# Altium PCB dev-Carry-Rev0.PcbDoc
Units mm, origin at the board's own origin, x right, y up, seen from the top; angles counter-clockwise.
Board outline 82.5 x 99.83 mm, 2 copper layers (Top Layer, Bottom Layer); 1 components, 0 nets, 64 pads, 2 vias.
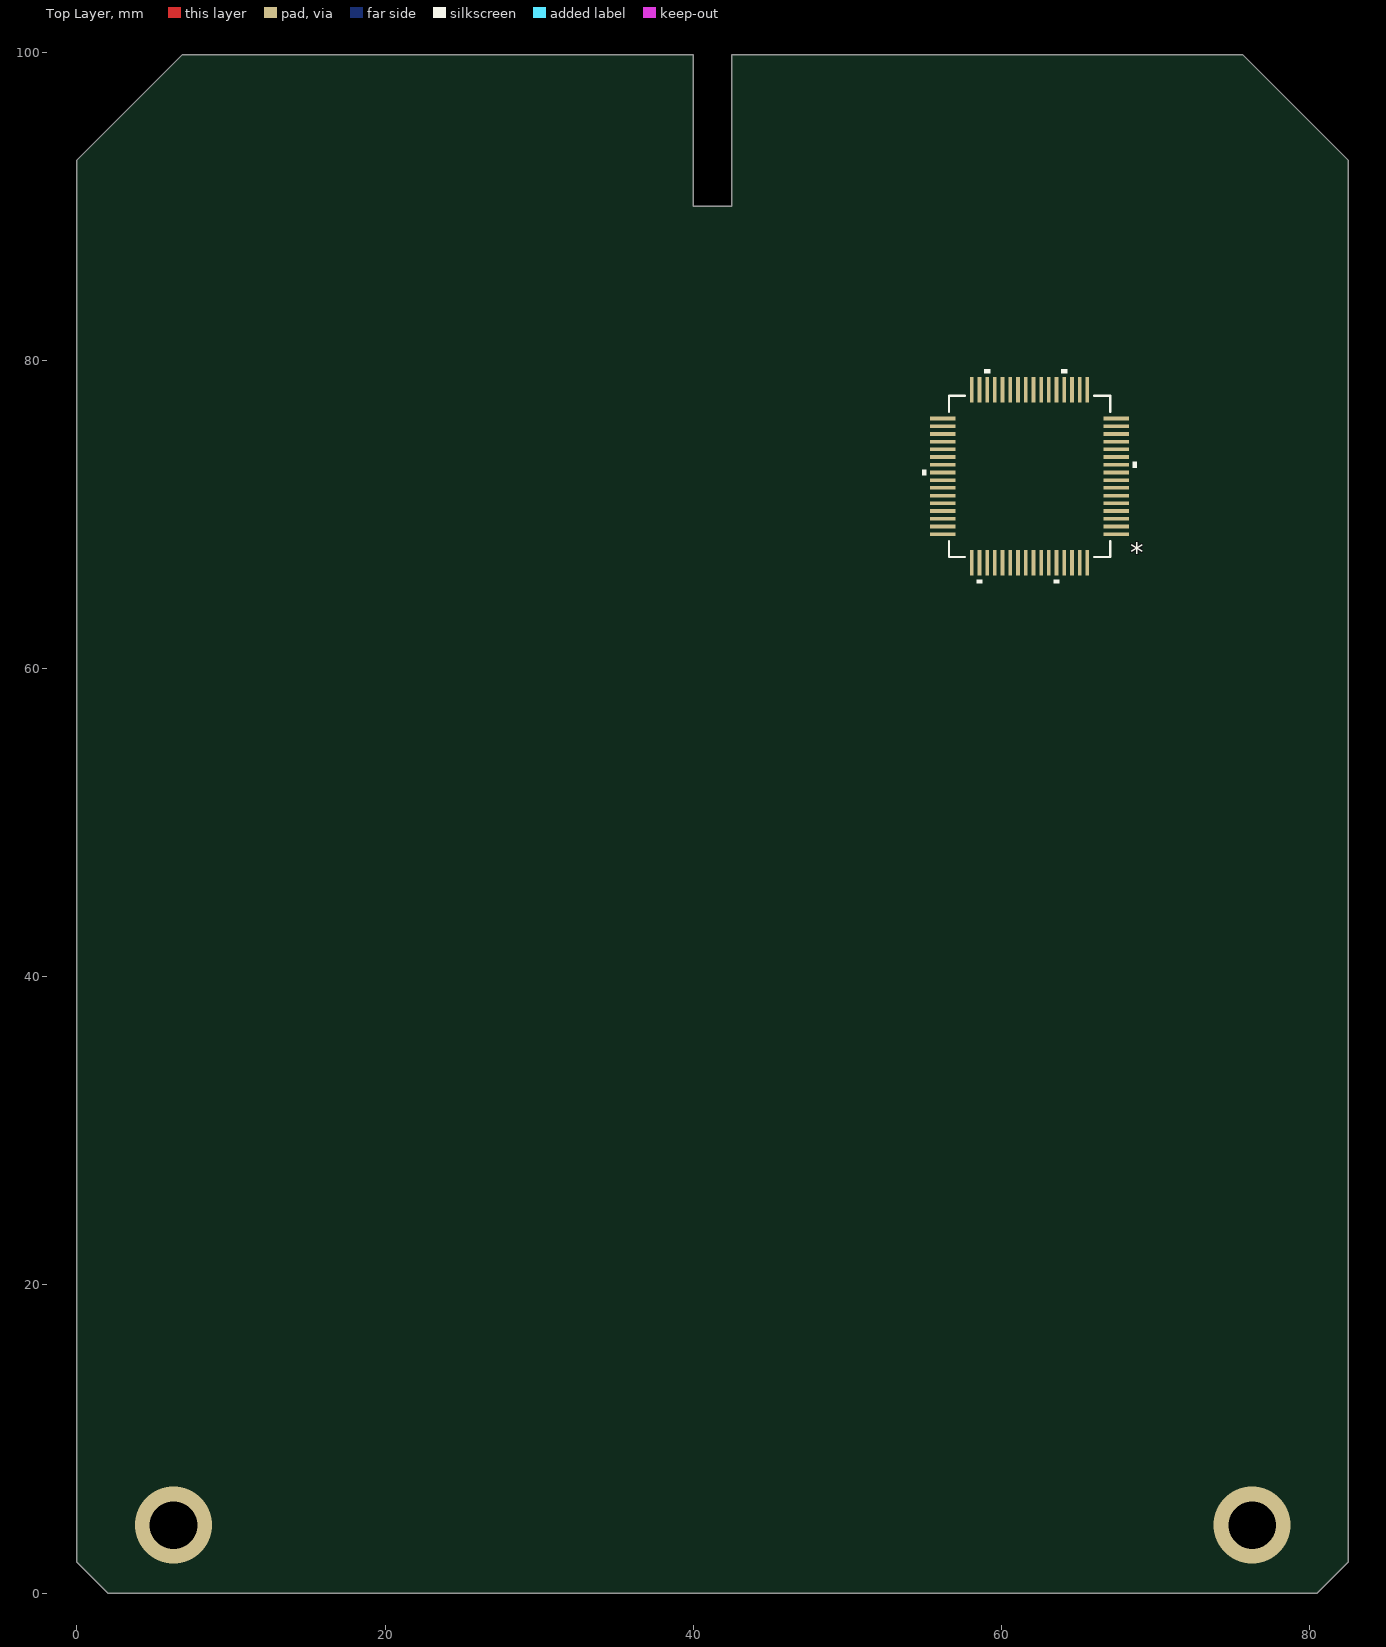
[diagram p0: Top Layer view]
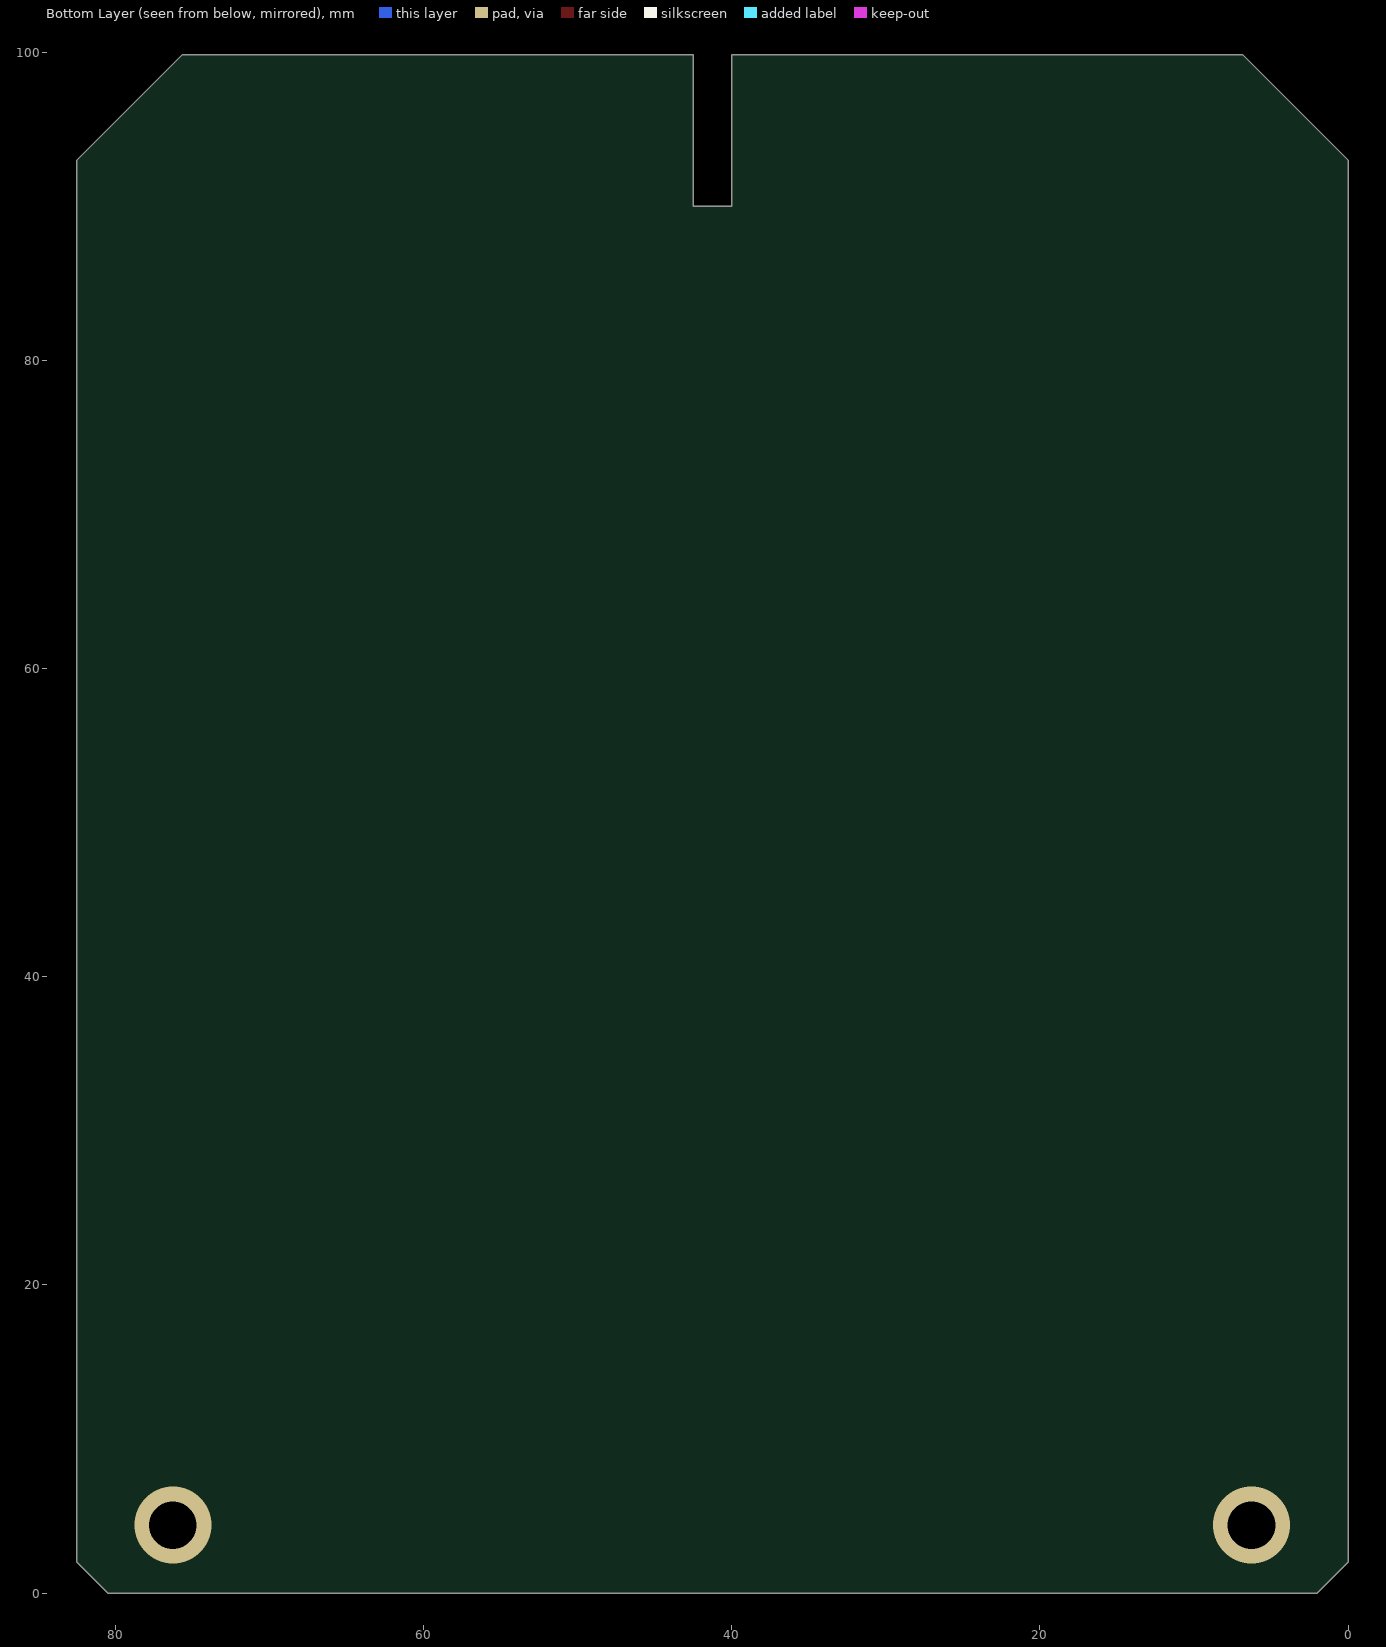
[diagram p1: Bottom Layer view, seen from below]

## Layer stack, top to bottom
Top Solder: solder mask 0.0102, Solder Resist, Dk 3.5
Top Layer: signal copper 0.0356
Dielectric 1: dielectric 0.32, FR-4, Dk 4.8
Bottom Layer: signal copper 0.0356
Bottom Solder: solder mask 0.0102, Solder Resist, Dk 3.5

## Board outline
42.5,99.825 42.5,90 40,90 40,99.825 6.825,99.825 0,93 0,2 2,0 80.5,0 82.5,2 82.5,93 75.675,99.825

## Design rules (kind name [scope] priority, off if disabled: settings)
Clearance [All] p1: gap=0.254 ignorepadtopadclearanceinfootprint=FALSE except(0: Arc-Hole Track-Hole SMDPad-Hole THPad-Hole Via-Hole Fill-Hole Poly-Hole Region-Hole Text-Hole)
PolygonConnect [All] p1: connectstyle=Relief reliefconductorwidth=0.254 reliefentries=4 polygonreliefangle="90 Angle" airgapwidth=0.254
RoutingVias [All] p1: holewidth=0.711 width=1.27 viastyle="Through Hole" minholewidth=0.711 minwidth=1.27 maxholewidth=0.711 maxwidth=1.27
SolderMaskExpansion [All] p1: expansion=0.102
Width [All] p1: maxlimit=0.254 minlimit=0.254 preferedwidth=0.254
30 further rules are at their usual default settings.

## Components (designator, comment, footprint, x,y, rotation, side; value= is the part's Value field where it differs from the comment)
? "Comment" PM64 61.825,72.475 r180 top

## Footprints (in the part's own frame and the unit in brackets; to place one, negate y for a bottom-side part, rotate by r counter-clockwise, add the part's x,y. Pads: shape width x height; smd on the part's side, far side on the other; paste and mask are expansions set on the pad)
PM64 [mm]
  rect 1.652x0.239 smd paste+0 mask+0: 1(-5.62,3.75) 2(-5.62,3.25) 3(-5.62,2.75) 4(-5.62,2.25) 5(-5.62,1.75) 6(-5.62,1.25) 7(-5.62,0.75) 8(-5.62,0.25) 9(-5.62,-0.25) 10(-5.62,-0.75) 11(-5.62,-1.25) 12(-5.62,-1.75) 13(-5.62,-2.25) 14(-5.62,-2.75) 15(-5.62,-3.25) 16(-5.62,-3.75) 33(5.62,-3.75) 34(5.62,-3.25) 35(5.62,-2.75) 36(5.62,-2.25) 37(5.62,-1.75) 38(5.62,-1.25) 39(5.62,-0.75) 40(5.62,-0.25) 41(5.62,0.25) 42(5.62,0.75) 43(5.62,1.25) 44(5.62,1.75) 45(5.62,2.25) 46(5.62,2.75) 47(5.62,3.25) 48(5.62,3.75)
  rect 0.239x1.652 smd paste+0 mask+0: 17(-3.75,-5.62) 18(-3.25,-5.62) 19(-2.75,-5.62) 20(-2.25,-5.62) 21(-1.75,-5.62) 22(-1.25,-5.62) 23(-0.75,-5.62) 24(-0.25,-5.62) 25(0.25,-5.62) 26(0.75,-5.62) 27(1.25,-5.62) 28(1.75,-5.62) 29(2.25,-5.62) 30(2.75,-5.62) 31(3.25,-5.62) 32(3.75,-5.62) 49(3.75,5.62) 50(3.25,5.62) 51(2.75,5.62) 52(2.25,5.62) 53(1.75,5.62) 54(1.25,5.62) 55(0.75,5.62) 56(0.25,5.62) 57(-0.25,5.62) 58(-0.75,5.62) 59(-1.25,5.62) 60(-1.75,5.62) 61(-2.25,5.62) 62(-2.75,5.62) 63(-3.25,5.62) 64(-3.75,5.62)
  silkscreen extent -6.95,-6.95 6.95,6.95, body extent -6.1,-6.1 6.1,6.1, height 1.6

## Via types
v1: diameter 5, hole 3.1, Top Layer to Bottom Layer, 2 vias

## Nets (pads, with @x,y where several pads share a name; then routed paths per layer and width w, separated by ;. In a path a pad name is that pad's centre, name@x,y a point inside that pad or via, vN(x,y) a via of type N, cw(c..) or ccw(c..) an arc to the next point about the centre after c; other vN are vias at no path point)
pads on no net: ?.1 ?.2 ?.3 ?.4 ?.5 ?.6 ?.7 ?.8 ?.9 ?.10 ?.11 ?.12 ?.13 ?.14 ?.15 ?.16 ?.17 ?.18 ?.19 ?.20 ?.21 ?.22 ?.23 ?.24 ?.25 ?.26 ?.27 ?.28 ?.29 ?.30 ?.31 ?.32 ?.33 ?.34 ?.35 ?.36 ?.37 ?.38 ?.39 ?.40 ?.41 ?.42 ?.43 ?.44 ?.45 ?.46 ?.47 ?.48 ?.49 ?.50 ?.51 ?.52 ?.53 ?.54 ?.55 ?.56 ?.57 ?.58 ?.59 ?.60 ?.61 ?.62 ?.63 ?.64
copper on no net:
  other v1: 6.275,4.41 76.275,4.41

## Text inside footprints (layer, text, board x,y; h text height)
?: Top Overlay "*" at 69.223,68.729 h1.27 r180; Mechanical 7 "Default Horiz Padstyle: r24_165" at 71.667,84.921 h1.27 r180; Mechanical 7 "Default Vert Padstyle: r24_165" at 71.35,86.445 h1.27 r180; Mechanical 7 "Alt 1 Padstyle: b152_229h76" at 70.397,91.017 h1.27 r180; Mechanical 7 "Alt 2 Padstyle: b229_152h76" at 70.397,92.541 h1.27 r180; Mechanical 7 "0.02in/0.5mm" at 52.681,69.293 h0.64 r180; Mechanical 7 "0.03in/0.762mm" at 58.428,63.331 h0.64 r180; Mechanical 7 "0.48in/12.192mm" at 64.206,61.426 h0.64 r180; Mechanical 7 "0.402in/10.211mm" at 64.365,82.254 h0.64 r180; Mechanical 7 "0.402in/10.211mm" at 76.049,72.793 h0.64 r180; Mechanical 7 "0.48in/12.192mm" at 50.776,72.793 h0.64 r180; Mechanical 13 "*" at 66.867,69.11 h1.27 r180